# Altium PCB Zigbee_GW.PcbDoc (part 2 of 2)
Units mm, origin at the board's own origin, x right, y up, seen from the top; angles counter-clockwise.
Board outline 80.85 x 47.5 mm, 2 copper layers (Top Layer, Bottom Layer), stack 1.569 mm thick; 135 components, 110 nets, 481 pads, 279 vias.
Unrouted connection lines stored in the file: 2.
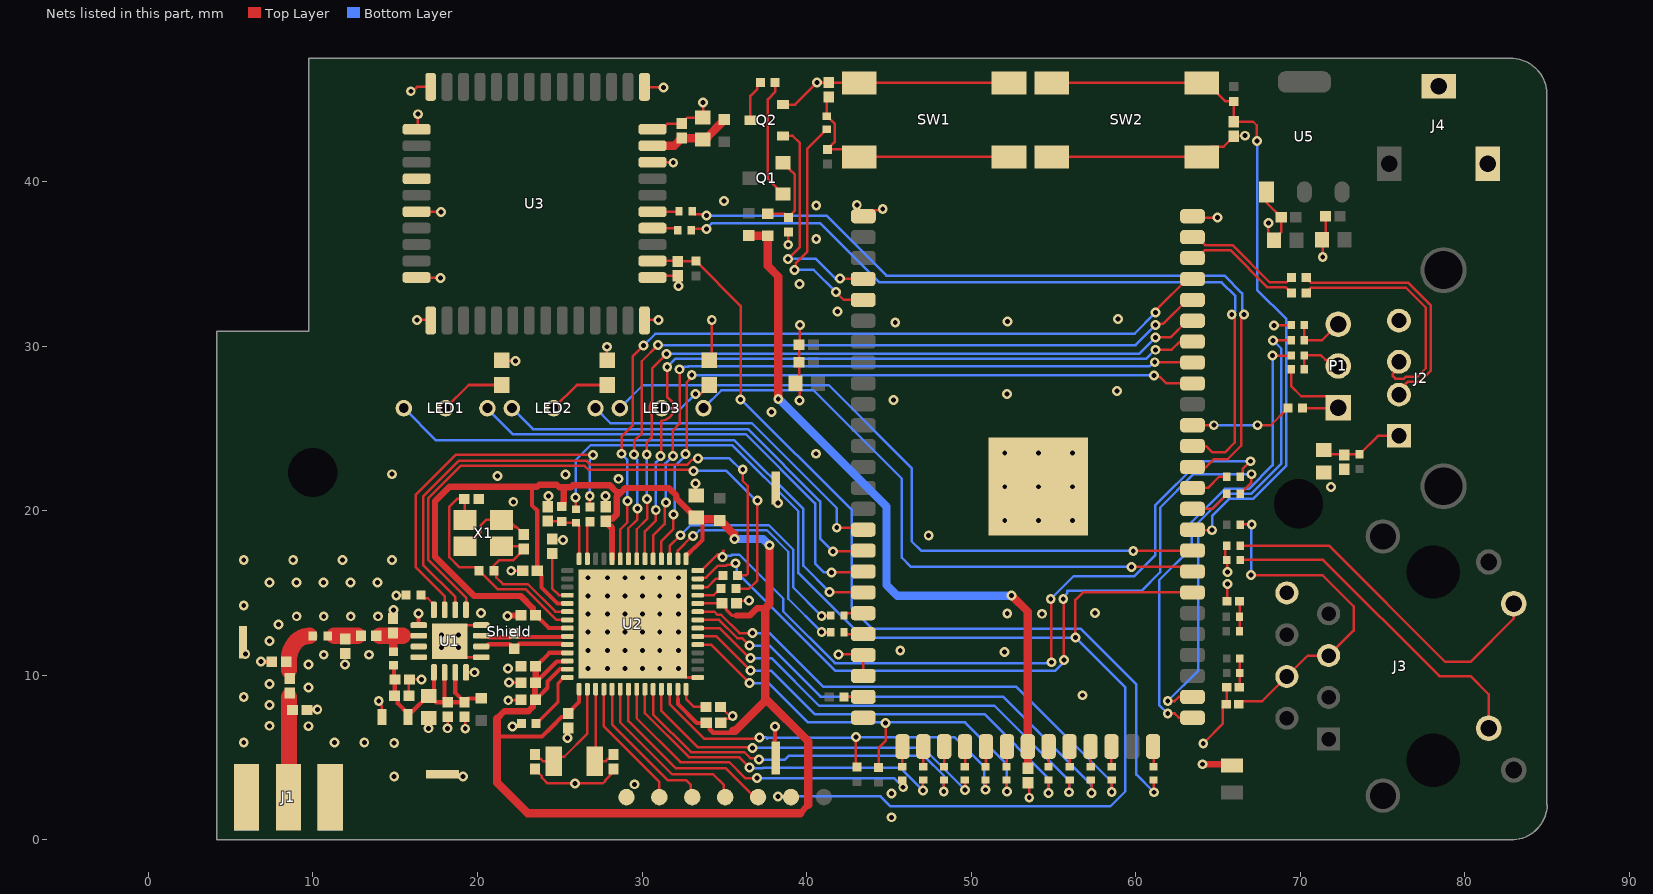
[diagram p2: the nets of this part, all layers, seen from the top]

## Via types
v1: diameter 0.6, hole 0.3, Top Layer to Bottom Layer, tented both sides, 279 vias

## Nets (pads, with @x,y where several pads share a name; then routed paths per layer and width w, separated by ;. In a path a pad name is that pad's centre, name@x,y a point inside that pad or via, vN(x,y) a via of type N, cw(c..) or ccw(c..) an arc to the next point about the centre after c; other vN are vias at no path point) (continued)
GND: ?.1 ?.22 ?.23 ?.25 ?.63 ?.64 C1.1 C2.1 C3.1 C4.1 C5.1 C6.1 C7.1 C8.1 C10.1 C11.1 C12.1 C13.1 C14.1 C15.1 C16.1 C17.1 C18.1 C19.1 C20.1 C21.1 C22.1 C23.1 C24.1 C25.1 C26.1 C27.1 C28.1 C29.1 C30.1 C31.1 C32.1 C33.1 C34.1 C35.1 C36.1 C46.1 C47.1 C48.1 C49.1 C50.1 C51.1 C52.1 C53.1 C54.1 C55.1 J1.2 J1.3 J1.4 J1.5 J2.4 J3.8 J4.2 J4.3 P1.1 Q2.2 R7.1 R9.1 R24.1 R28.1 R29.1 R34.1 R36.2 R38.1 R39.1 R40.1 R51.1 R52.1 Shield.1 Shield.2 Shield.3 Shield.4 SW1.3 SW1.4 SW2.3 SW2.4 TP7.1 U1.1 U1.4 U1.9 U1.11 U1.12 U1.16 U1.17 U2.1 U2.57 U3.1 U3.8 U3.10 U3.11 U3.24 U3.25 U3.28 U3.30 U3.34 U3.35 U3.48 U5.1 X1.2 X1.4 | length 122.5
  Top Layer w0.152: v1(13.995,8.433) 13.995,8.327 14.186,8.137 C6.1@14.186,7.468 ; v1(15.062,14.86) 15.629,14.86 R7.1@15.654,14.884 ; C7.1@15.832,8.763 15.832,9.728 C8.1@15.858,9.754 v1(16.603,9.754) ; v1(15.945,45.502) 16.066,45.502 16.334,45.771 U3.24@17.149,45.771 ; U3.34@16.3,34.184 16.318,34.166 17.73,34.166 v1(17.748,34.148) ; U3.30@16.3,38.184 16.311,38.173 17.762,38.173 v1(17.773,38.162) ; U3.25@16.3,43.184 16.376,43.26 v1(16.376,44.105) ; v1(16.326,31.608) 17.114,31.608 U3.35@17.15,31.572 ; v1@17.018,6.851 17.018,7.377 C31.1@17.043,7.402 ; v1(18.186,6.782) C32.1@18.186,7.485 ; U1.17@18.771,11.633 U1.17@19.301,11.103 ; U1.17@18.771,12.522 U1.17@19.301,13.053 ; C33.1@19.202,7.485 19.253,7.434 v1(19.253,6.756) ; X1.4@19.245,17.844 19.345,17.844 20.193,18.691 20.193,19.12 20.517,19.444 X1.2@21.445,19.444 21.891,19.444 22.276,19.059 22.276,19.016 22.363,19.016 22.809,18.57 C19.1@22.809,18.55 ; U1.16@19.302,10.178 19.309,10.185 v1(19.812,10.185) ; U1.1@20.226,11.103 U1.17@19.301,11.103 ; U1.4@20.226,13.053 U1.17@19.301,13.053 ; R38.1@21.463,29.147 21.502,29.108 v1(22.301,29.108) ; v1(21.869,8.484) 22.242,8.484 22.268,8.509 ; v1(21.92,9.576) 22.242,9.576 22.268,9.55 ; v1(22.047,16.358) C22.1@22.75,16.358 ; C17.1@23.495,4.31 23.495,4.29 23.904,3.881 23.904,3.781 24.256,3.429 27.613,3.429 27.772,3.587 27.772,3.635 28.27,4.134 C18.1@28.27,4.154 ; C14.1@24.257,20.252 24.308,20.303 v1(24.308,20.904) ; C16.1@24.536,18.296 24.604,18.228 v1(25.197,18.228) ; v1(25.476,6.198) 25.476,6.774 C24.1@25.502,6.799 ; C29.1@27.788,20.244 27.762,20.269 27.788,20.295 v1(27.788,20.904) ; v1(27.864,29.972) 27.864,29.173 R39.1@27.889,29.147 ; U2.57@29.426,13.119 32.676,9.869 U2.1@33.387,9.869 ; U3.11@30.149,45.771 30.189,45.731 v1(31.312,45.731) ; U3.48@30.185,31.608 v1(31.007,31.608) ; U3.1@30.635,34.184 30.733,34.282 C36.1@32.182,34.282 ; U3.8@30.635,41.184 30.648,41.172 31.883,41.172 v1(31.896,41.159) ; U3.10@30.635,43.184 31.207,43.184 31.552,43.529 32.396,43.529 C35.1@32.41,43.544 32.41,43.564 32.738,43.891 C34.1@33.706,43.891 ; C36.1@32.167,34.282 32.156,33.985 32.233,33.909 32.207,33.884 v1(32.207,33.655) ; C21.1@33.249,20.945 v1(33.249,21.666) ; C34.1@33.68,43.906 33.706,43.931 v1(33.706,44.82) ; R40.1@34.087,29.147 34.239,29.3 v1(34.239,31.598) ; C23.1@34.783,7.112 35.026,7.356 35.225,7.356 35.388,7.518 v1(35.509,7.518) 35.424,7.604 35.266,7.604 34.793,8.077 C15.1@34.773,8.077 C15.1@34.959,7.891 ; C23.1@34.806,7.112 34.908,7.112 C23.1@34.959,7.163 ; C30.1@35.746,14.376 35.917,14.548 v1(36.5,14.548) ; Q2.2@38.565,44.691 39.306,44.691 v1(40.64,46.025) 41.343,46.025 C1.1@41.351,46.033 41.37,46.014 SW1.4@43.202,46.014 SW1.3@52.302,46.014 ; v1(38.887,36.17) R36.2@38.887,36.939 ; v1(39.573,26.695) 39.573,27.367 39.395,27.544 39.472,27.621 C2.1@39.33,27.762 39.54,27.972 C3.1@39.54,29.032 C4.1@39.54,30.099 39.522,30.099 39.599,30.175 v1(39.599,31.293) ; v1(41.935,11.278) 43.4,11.278 ?.22@43.445,11.233 ?.23@43.445,9.963 ; ?.1@43.455,37.903 43.809,38.256 44.418,38.256 44.507,38.345 v1(44.628,38.345) ; C5.1@53.458,3.47 53.466,3.478 53.534,3.41 v1(53.534,2.563) ; SW2.3@54.911,41.514 SW2.4@64.011,41.514 64.635,42.138 65.356,42.138 65.964,42.745 C55.1@65.964,42.765 65.997,42.799 v1(66.65,42.799) ; ?.63@63.455,37.903 63.537,37.821 v1(64.973,37.821) ; v1(64.11,5.867) 65.305,7.063 65.305,8.071 65.489,8.255 C48.1@65.509,8.255 65.533,8.255 C50.1@65.533,9.271 ; R29.1@65.45,17.031 65.45,17.869 R28.1@65.462,17.882 ; C49.1@65.457,14.503 65.38,14.581 65.583,14.784 v1(65.583,15.545) ; R29.1@65.548,17.018 65.565,17.001 65.565,16.299 v1(65.583,16.281) ; U5.1@67.966,39.428 67.966,38.711 68.831,37.846 C54.1@68.851,37.846 68.851,36.937 68.413,36.499 C53.1@68.413,36.449 68.072,36.79 v1(68.072,37.49) ; v1(68.402,31.267) 69.425,31.267 R51.1@69.45,31.293 ; R52.1@69.45,28.6 69.45,27.578 70.066,26.962 71.615,26.962 72.288,26.289 72.288,26.238 R24.1@70.148,26.238 ; v1(71.374,35.433) 71.374,36.434 C51.1@71.334,36.474 71.544,36.684 C52.1@71.544,37.897 ; U1.17@19.301,11.103 U1.17@18.326,12.078 U1.17@19.301,13.053
  Top Layer w0.254: v1(6.833,10.846) ccw(c6.894,10.907) 6.894,10.82 C12.1@7.474,10.82 ; C13.1@9.635,7.899 cw(c9.696,7.838) 9.696,7.925 v1(10.262,7.925) ; C10.1@14.859,13.445 14.872,13.457 14.872,13.957 v1(14.884,13.97) ; v1(16.408,13.767) 16.408,13.07 U1.9@16.426,13.053 ; 38.049,6.071 ccw(c37.988,6.132) 38.075,6.132 v1(38.075,6.883)
  Top Layer w0.381: v1(21.832,13.614) 21.858,13.64 22.611,13.64 C28.1@22.637,13.665 ; v1(64.055,4.597) 65.798,4.597 R34.1@65.862,4.533
  other v1: 45.161,1.372 45.161,2.819 29.54,3.378 25.934,3.429 14.935,3.861 19.126,3.861 14.935,5.893 5.791,5.918 11.303,5.918 13.119,5.918 17.018,6.782 22.123,6.883 9.728,6.909 7.366,6.934 7.366,8.204 5.791,8.693 56.769,8.788 9.728,9.271 7.366,9.474 21.844,10.414 26.726,10.419 27.902,10.419 28.96,10.419 30.019,10.419 31.077,10.419 32.22,10.419 9.728,10.668 11.938,10.668 10.655,11.252 13.411,11.252 5.886,11.3 52.019,11.43 45.695,11.506 26.726,11.521 27.902,11.521 28.96,11.521 30.019,11.521 31.077,11.521 32.22,11.521 17.818,11.697 18.834,11.697 7.366,12.09 17.818,12.459 18.834,12.459 26.726,12.624 27.902,12.624 28.96,12.624 30.019,12.624 31.077,12.624 32.22,12.624 7.899,13.081 9.011,13.589 10.655,13.589 12.294,13.589 13.945,13.589 26.726,13.726 27.902,13.726 28.96,13.726 30.019,13.726 31.077,13.726 32.22,13.726 54.305,13.741 52.197,13.767 20.218,13.792 57.531,13.792 5.791,14.243 26.726,14.828 27.902,14.828 28.96,14.828 30.019,14.828 31.077,14.828 32.22,14.828 7.366,15.646 9.004,15.646 10.643,15.646 12.281,15.646 13.919,15.646 26.726,15.931 27.902,15.931 28.96,15.931 30.019,15.931 31.077,15.931 32.22,15.931 5.791,17.018 8.797,17.018 11.803,17.018 14.808,17.018 47.422,18.491 52.045,19.406 54.102,19.406 56.159,19.406 38.252,20.472 22.174,20.549 71.882,21.438 52.045,21.463 54.102,21.463 56.159,21.463 28.575,21.946 21.209,22.123 25.349,22.2 14.808,22.225 40.564,23.47 52.045,23.52 54.102,23.52 56.159,23.52 37.871,26.01 45.288,26.746 52.172,27.102 58.877,27.28 45.39,31.445 52.222,31.496 58.928,31.648 41.885,32.106 39.573,33.782 40.589,36.525 40.589,38.557 43.053,38.583 34.976,38.837
GPIO_15: ?.46 LED3.1 | length 37.5
  Top Layer w0.152: v1(59.741,16.586) 63.182,16.586 ?.46@63.455,16.313
  Bottom Layer w0.152: LED3.1@33.731,26.238 34.819,27.326 40.416,27.326 45.786,21.956 45.786,17.155 46.355,16.586 v1(59.741,16.586)
GPIO_16: ?.47 LED3.3 | length 42.2
  Top Layer w0.152: v1(59.855,17.564) 63.437,17.564 ?.47@63.455,17.583
  Bottom Layer w0.152: LED3.3@28.651,26.238 30.043,27.63 41.356,27.63 46.389,22.597 46.389,18.152 46.977,17.564 v1(59.855,17.564)
GPIO_17: ?.48 C55.2 R37.1 SW2.1 SW2.2 | length 43.7
  Top Layer w0.152: SW2.1@54.911,46.014 SW2.2@64.011,46.014 64.361,46.014 64.985,45.39 64.985,45.364 65.46,44.889 R37.1@65.964,44.889 C55.2@65.964,43.645 67.149,43.645 67.361,43.434 67.361,42.418 67.386,42.443 v1(67.386,42.469) ; ?.48@63.455,18.853 63.486,18.821 v1(64.643,18.821)
  Bottom Layer w0.152: v1(64.643,18.821) 64.643,19.696 65.673,20.726 67.142,20.726 69.159,22.744 69.159,31.659 67.386,33.433 v1(67.386,42.469)
GPIO_41: ?.16 LED2.1 | length 20
  Top Layer w0.152: v1(41.834,18.974) 43.324,18.974 ?.16@43.445,18.853
  Bottom Layer w0.152: LED2.1@27.165,26.238 28.08,25.324 36.677,25.324 41.834,20.167 v1(41.834,18.974)
GPIO_42: ?.17 LED2.3 | length 26.3
  Top Layer w0.152: v1(41.605,17.526) 41.634,17.554 43.245,17.554 ?.17@43.359,17.669
  Bottom Layer w0.152: LED2.3@22.085,26.238 23.36,24.963 36.428,24.963 40.818,20.573 40.818,18.313 v1(41.605,17.526)
GPIO_43: ?.18 LED1.1 | length 29.2
  Top Layer w0.152: v1(41.504,16.256) 43.389,16.256 ?.18@43.445,16.313
  Bottom Layer w0.152: LED1.1@20.599,26.238 20.599,26.187 22.128,24.659 36.301,24.659 40.513,20.447 40.513,16.795 41.052,16.256 v1(41.504,16.256)
JTAG_TCK: TP3.1 U2.47 | length 9.2
  Top Layer w0.152: U2.47@28.176,9.158 28.176,7.01 31.554,3.632 32.664,3.632 32.968,3.329 32.968,2.684 TP3.1@33.052,2.6
JTAG_TD0: TP5.1 U2.48 | length 10.7
  Top Layer w0.152: U2.48@28.676,9.158 28.676,7.138 31.826,3.988 34.315,3.988 34.975,3.329 34.975,2.677 TP5.1@35.052,2.6
JTAG_TDI: TP4.1 U2.49 | length 11.7
  Top Layer w0.152: U2.49@29.176,9.158 29.176,7.222 32.055,4.343 35.096,4.343 36.84,2.6 TP4.1@37.052,2.6
JTAG_TMS: TP2.1 U2.46 | length 8
  Top Layer w0.152: U2.46@27.675,9.158 27.675,6.894 31.052,3.517 TP2.1@31.052,2.6
Net_5: ?.5 R41.2 | length 14.3
  Top Layer w0.152: v1(39.268,34.646) 39.33,34.707 39.33,35.038 40.03,35.738 40.03,41.993 41.05,43.013 41.05,43.038 41.199,43.186 R41.2@41.224,43.186 ; v1(41.783,33.299) 42.26,32.823 ?.5@43.445,32.823
  Bottom Layer w0.152: v1(39.268,34.646) 40.437,34.646 v1(41.783,33.299)
Net_20: ?.20 R45.1 | length 1.2
  Top Layer w0.152: R45.1@42.277,13.64 42.361,13.64 42.494,13.773 ?.20@43.445,13.773
Net_21: ?.21 R44.1 | length 1.2
  Top Layer w0.152: R44.1@42.277,12.624 42.373,12.624 42.494,12.503 ?.21@43.445,12.503
Net_24: ?.24 R23.2 | length 1.2
  Top Layer w0.152: R23.2@42.277,8.687 42.282,8.693 ?.24@43.445,8.693
Net_26: ?.26 R22.2 | length 1.2
  Top Layer w0.152: R22.2@45.822,4.439 45.825,4.442 ?.26@45.825,5.673
Net_27: ?.27 R11.2 | length 1.2
  Top Layer w0.152: ?.27@47.095,5.673 47.095,4.471 R11.2@47.127,4.439
Net_28: ?.28 R46.2 | length 1.3
  Top Layer w0.152: ?.28@48.365,5.673 48.365,4.506 R46.2@48.433,4.439
Net_29: ?.29 R47.2 | length 1.3
  Top Layer w0.152: ?.29@49.635,5.673 49.635,4.542 R47.2@49.738,4.439
Net_30: ?.30 R48.2 | length 1.3
  Top Layer w0.152: ?.30@50.905,5.673 50.905,4.577 R48.2@51.044,4.439
Net_31: ?.31 R49.2 | length 1.2
  Top Layer w0.152: R49.2@52.146,4.439 52.175,4.468 ?.31@52.175,5.673
Net_33: ?.33 R14.1 | length 1.2
  Top Layer w0.152: R14.1@54.712,4.439 54.715,4.442 ?.33@54.715,5.673
Net_34: ?.34 R15.1 | length 1.2
  Top Layer w0.152: ?.34@55.985,5.673 55.985,4.443 R15.1@55.99,4.439
Net_35: ?.35 R16.1 | length 1.2
  Top Layer w0.152: ?.35@57.255,5.673 57.255,4.452 R16.1@57.269,4.439
Net_36: ?.36 R17.1 | length 1.2
  Top Layer w0.152: ?.36@58.525,5.673 58.525,4.46 R17.1@58.547,4.439
Net_38: ?.38 R13.1 | length 1.2
  Top Layer w0.152: ?.38@61.065,5.673 61.087,5.651 R13.1@61.087,4.439
Net_39: ?.39 R19.1 | length 28.4
  Top Layer w0.152: v1(61.951,7.681) 62.37,7.681 62.629,7.423 ?.39@63.455,7.423 ; v1(68.326,29.439) 69.435,29.439 R19.1@69.444,29.447
  Bottom Layer w0.152: v1(61.951,7.681) 61.422,8.21 61.422,15.779 63.421,17.778 63.421,19.337 65.421,21.336 66.889,21.336 68.326,22.773 v1(68.326,29.439)
Net_40: ?.40 R18.1 | length 28.6
  Top Layer w0.152: v1(61.951,8.434) 62.37,8.434 62.629,8.693 ?.40@63.455,8.693 ; v1(68.351,30.353) 69.427,30.353 R18.1@69.444,30.37
  Bottom Layer w0.152: v1(61.951,8.434) 63.792,10.275 63.792,19.276 65.547,21.031 67.015,21.031 68.855,22.87 68.855,29.85 v1(68.351,30.353)
Net_45: ?.45 R12.1 TP6.1 | length 83.6
  Top Layer w0.152: v1(25.959,20.803) 25.959,20.161 25.933,20.136 R12.1@25.984,20.085 ; v1(38.252,2.642) 38.273,2.621 39.031,2.621 TP6.1@39.052,2.6 ; v1(56.337,12.294) 56.337,14.58 56.8,15.043 ?.45@63.455,15.043
  Bottom Layer w0.152: v1(25.959,20.803) 25.959,23.074 26.883,23.998 35.474,23.998 39.497,19.975 39.497,16.22 43.423,12.294 v1(56.337,12.294) ; v1(38.252,2.642) 44.501,2.642 45.108,2.035 58.459,2.035 59.38,2.956 59.38,9.25 v1@56.312,12.319
Net_49: ?.49 R50.1 | length 2.5
  Top Layer w0.152: ?.49@63.455,20.123 64.664,20.123 65.548,21.006 R50.1@65.548,21.031
Net_50: ?.50 R6.1 | length 2.4
  Top Layer w0.152: ?.50@63.455,21.393 64.395,21.393 65.075,22.073 R6.1@65.548,22.073
Net_51: ?.51 R43.1 | length 48.4
  Top Layer w0.152: R43.1@33.045,38.202 33.045,38.177 33.194,38.028 33.829,38.028 v1(33.909,37.948) ; ?.51@63.455,22.663 64.281,22.663 64.764,23.145 65.599,23.145 66.421,23.967 66.421,31.755 v1(66.594,31.928)
  Bottom Layer w0.152: v1(33.909,37.948) 41.199,37.948 44.856,34.29 65.396,34.29 66.472,33.214 66.472,32.05 v1(66.594,31.928)
Net_52: ?.52 R42.1 | length 47.1
  Top Layer w0.152: R42.1@32.982,37.059 33.058,37.135 v1(33.909,37.135) ; ?.52@63.455,23.933 64.281,23.933 64.662,23.552 65.43,23.552 66.015,24.136 66.015,31.755 v1(65.842,31.928)
  Bottom Layer w0.152: v1(33.909,37.135) 34.257,37.482 40.826,37.482 44.425,33.884 65.227,33.884 66.065,33.045 66.065,32.152 v1(65.842,31.928)
Net_53: ?.53 R24.2 | length 6.2
  Top Layer w0.152: ?.53@63.455,25.203 v1(64.75,25.203) ; v1(67.417,25.203) 68.212,25.203 R24.2@69.248,26.238
  Bottom Layer w0.152: v1(64.75,25.203) v1(67.417,25.203)
NetC1_2: C1.2 R1.1 R41.1 SW1.1 SW1.2 | length 14.8
  Top Layer w0.152: C1.2@41.351,45.153 41.224,45.026 R41.1@41.224,43.986 41.249,43.986 41.707,43.529 41.707,42.404 R1.1@41.275,41.972 42.744,41.972 SW1.2@43.202,41.514 SW1.1@52.302,41.514
NetC9_1: C9.1 C12.2 L3.2 | length 2.8
  Top Layer w1: 8.543,10.312 8.543,10.82 8.543,10.981 cw(c10.076,10.981) 8.992,12.065 cw(c9.789,11.268) L3.2@9.789,12.395
NetC9_2: C9.2 C13.2 J1.1 | length 6.1
  Top Layer w1: J1.1@8.543,2.591 C9.2@8.543,8.687
NetC10_2: C10.2 L1.2 L4.1 U1.10 | length 2.6
  Top Layer w0.5: C10.2@14.859,12.565 14.872,12.552 14.872,12.395 14.872,11.451 L1.2@14.884,11.439
  Top Layer w1: L4.1@14.046,12.395 14.872,12.395 15.469,12.395
NetC11_2: C11.2 L3.1 L4.2 | length 1.4
  Top Layer w1: 11.303,12.395 L4.2@12.725,12.395
NetC14_2: C14.2 R4.1 R12.2 U2.28 | length 4.1
  Top Layer w0.152: C14.2@24.257,19.372 24.267,19.362 R4.1@25.121,19.362 25.198,19.285 26.009,19.285 26.175,19.119 U2.28@26.175,17.08
NetC15_2: C15.2 U2.56 | length 2
  Top Layer w0.152: U2.56@32.677,9.158 32.677,8.553 33.152,8.077 C15.2@33.893,8.077
NetC16_2: C16.2 U2.32 | length 3.2
  Top Layer w0.152: C16.2@24.536,17.416 24.536,15.291 24.949,14.878 25.456,14.878 U2.32@25.465,14.869
NetC17_2: C17.2 U2.44 Y1.1 | length 6.8
  Top Layer w0.152: C17.2@23.495,5.19 23.495,5.17 23.729,4.936 23.832,4.936 23.993,4.775 Y1.1@24.633,4.775 24.911,5.054 25.272,5.054 26.675,6.457 U2.44@26.675,9.158
NetC18_2: C18.2 U2.45 Y1.2 | length 5.7
  Top Layer w0.152: U2.45@27.175,9.158 27.175,4.818 Y1.2@27.133,4.775 27.772,4.775 27.933,4.936 28.036,4.936 28.27,5.17 C18.2@28.27,5.19
NetC19_2: C19.2 R8.1 U2.34 X1.3 | length 9.8
  Top Layer w0.152: R8.1@20.955,16.358 20.955,16.637 21.311,16.993 22.149,16.993 22.573,17.416 22.575,17.416 22.809,17.65 C19.2@22.809,17.67 22.809,17.844 X1.3@21.445,17.844 ; R8.1@20.999,16.358 21.141,16.215 21.141,15.943 21.539,15.545 23.052,15.545 24.727,13.869 U2.34@25.465,13.869
NetC20_2: C20.2 R8.2 U2.35 X1.1 | length 14.2
  Top Layer w0.152: X1.1@19.245,19.444 19.233,19.456 19.233,20.688 C20.2@19.194,20.726 18.763,20.726 18.288,20.251 18.288,17.178 18.909,16.556 19.9,16.556 21.216,15.24 22.925,15.24 24.796,13.369 U2.35@25.465,13.369
NetC34_2: C34.2 C35.2 FB4.1 U3.9 | length 5
  Top Layer w0.508: U3.9@30.635,42.184 31.951,42.184 C35.2@32.41,42.644 ; C35.2@32.41,42.664 C35.2@32.41,42.644 ; C34.2@33.976,42.644 C35.2@32.41,42.644 ; C34.2@33.976,42.727 34.905,43.656 34.905,43.708 34.976,43.779 FB4.1@35.001,43.779
NetC36_2: C36.2 R10.1 R13.2 U3.2 | length 54.7
  Top Layer w0.152: U3.2@30.635,35.184 32.159,35.184 C36.2@32.182,35.162 33.264,35.162 R10.1@33.274,35.172 35.992,32.454 v1(35.992,26.772) ; R13.2@61.087,3.639 61.112,3.613 v1(61.112,2.896)
  Bottom Layer w0.152: v1(35.992,26.772) 36.016,26.772 42.748,20.039 42.748,14.072 43.998,12.822 56.672,12.822 60.046,9.449 60.046,3.962 v1(61.112,2.896)
NetC46_2: C46.2 C47.2 FB5.2 J2.1 | length 5.2
  Top Layer w0.152: C46.2@71.425,23.687 71.675,23.437 72.634,23.437 C47.2@72.669,23.402 72.705,23.437 FB5.2@73.609,23.437 74.731,24.558 J2.1@76.005,24.558
NetC48_2: C48.2 J3.2 J3.5 R27.1 | length 21.1
  Top Layer w0.152: C48.2@66.269,8.255 66.452,8.439 67.697,8.439 70.46,11.201 J3.5@71.73,11.201 73.254,12.725 73.254,14.199 71.374,16.078 v1@67.005,16.078 ; R27.1@66.348,19.152 66.373,19.177 v1(67.056,19.177)
  Bottom Layer w0.152: v1(67.005,16.104) 67.031,16.129 67.031,19.152 v1(67.056,19.177)
NetC49_2: C49.2 R30.1 R31.1 | length 1.8
  Top Layer w0.152: R30.1@66.313,12.675 R31.1@66.313,13.564 66.313,14.498 C49.2@66.318,14.503
NetC50_2: C50.2 R32.1 R33.1 | length 1.8
  Top Layer w0.152: C50.2@66.293,9.271 66.338,9.316 R33.1@66.338,11.024
NetFB6_1: FB6.1 Q1.2 R36.1 | length 5.2
  Top Layer w0.152: FB6.1@37.643,38.064 38.662,38.064 R36.1@38.887,37.839 39.294,38.245 39.294,40.431 38.94,40.784 38.94,40.834 38.617,41.158 Q1.2@38.567,41.158
NetJ3_10: J3.10 R29.2 | length 20.7
  Top Layer w0.152: R29.2@66.237,17.018 71.399,17.018 78.461,9.957 80.34,9.957 81.46,8.837 J3.10@81.46,6.781
NetJ3_11: J3.11 R28.2 | length 21.6
  Top Layer w0.152: R28.2@66.262,17.882 71.757,17.882 78.818,10.82 80.34,10.82 82.98,13.46 J3.11@82.98,14.351
NetLED1_2: LED1.2 R38.2 | length 4
  Top Layer w0.152: LED1.2@18.059,26.238 19.468,27.647 R38.2@21.463,27.647
NetLED2_2: LED2.2 R39.2 | length 3.8
  Top Layer w0.152: LED2.2@24.625,26.238 26.034,27.647 R39.2@27.889,27.647
NetLED3_2: LED3.2 R40.2 | length 3.6
  Top Layer w0.152: v1(33.245,27.099) 33.365,27.099 33.452,27.012 R40.2@34.087,27.647
  Bottom Layer w0.152: LED3.2@31.191,26.238 32.384,26.238 v1(33.245,27.099)
NetP1_2: P1.2 R19.2 R52.2 | length 3.2
  Top Layer w0.152: R52.2@70.25,28.6 R19.2@70.25,29.447 71.264,29.447 71.526,29.185 71.555,29.185 71.936,28.804 P1.2@72.314,28.804
NetP1_3: P1.3 R18.2 R51.2 | length 3.4
  Top Layer w0.152: R51.2@70.25,31.293 R18.2@70.25,30.37 71.34,30.37 P1.3@72.314,31.344
NetQ1_1: Q1.1 R35.1 | length 7.4
  Top Layer w0.152: R35.1@38.093,46.025 38.093,45.459 37.643,45.009 37.643,40.182 38.193,39.632 38.193,39.582 38.517,39.258 Q1.1@38.567,39.258
NetQ2_3: Q2.3 R35.2 | length 2.5
  Top Layer w0.152: Q2.3@36.583,43.739 36.583,45.219 37.007,45.643 37.007,45.839 R35.2@37.193,46.025
NetR2_2: R2.2 U1.5 | length 35.8
  Top Layer w0.152: U1.5@19.302,13.983 19.302,14.726 16.996,17.032 16.996,20.755 18.974,22.733 26.507,22.733 26.731,22.509 33.041,22.509 v1(33.122,22.428) ; R2.2@35.705,15.265 36.5,15.265 37.008,15.773 v1(37.008,20.625)
  Bottom Layer w0.152: v1(33.122,22.428) 35.123,22.428 36.927,20.625 v1(37.008,20.625)
NetR3_2: R3.2 U1.6 | length 35.7
  Top Layer w0.152: U1.6@18.651,13.978 18.651,14.75 16.691,16.71 16.691,20.881 18.848,23.038 26.634,23.038 26.857,22.814 32.756,22.814 33.047,23.105 33.315,23.105 v1(33.401,23.19) ; R3.2@35.807,16.078 36.334,16.078 36.424,16.167 36.424,21.514 36.119,21.819 v1(36.119,22.504)
  Bottom Layer w0.152: v1(33.401,23.19) 35.312,23.19 35.998,22.504 v1(36.119,22.504)
NetR5_2: R5.2 U1.7 | length 22.8
  Top Layer w0.152: U1.7@18.001,13.978 18.001,14.816 16.256,16.561 16.256,20.98 18.669,23.393 v1(27.026,23.393) ; U1.7@18.039,14.015 U1.7@18.076,13.978 ; v1(26.822,20.904) 26.822,20.313 26.797,20.287 R5.2@26.848,20.237
  Bottom Layer w0.152: v1(26.822,20.904) 26.822,23.08 27.026,23.284 v1(27.026,23.393)
NetR7_2: R7.2 U1.8 | length 1.4
  Top Layer w0.152: R7.2@16.554,14.884 16.752,14.686 16.973,14.686 17.351,14.308 U1.8@17.351,13.983
NetR9_2: R9.2 U2.42 | length 3.7
  Top Layer w0.203: R9.2@23.564,7.061 24.284,7.782 24.892,8.389 24.892,9.523 25.19,9.821 25.417,9.821 U2.42@25.465,9.869
NetR42_2: R42.2 U3.4 | length 1.6
  Top Layer w0.152: U3.4@30.635,37.184 32.056,37.184 R42.2@32.182,37.059
NetR43_2: R43.2 U3.5 | length 1.6
  Top Layer w0.152: U3.5@30.635,38.184 32.228,38.184 R43.2@32.245,38.202
NetR44_2: R44.2 U2.16 | length 14.6
  Top Layer w0.152: U2.16@32.177,17.08 32.183,17.086 32.183,17.596 33.053,18.466 v1(33.088,18.466) ; v1@40.928,12.689 41.019,12.598 41.451,12.598 R44.2@41.477,12.624
  Bottom Layer w0.152: v1(33.088,18.466) 33.134,18.466 33.485,18.817 37.582,18.817 38.887,17.512 38.887,14.656 v1(40.919,12.624)
NetR45_2: R45.2 U2.17 | length 14.8
  Top Layer w0.152: U2.17@31.676,17.08 31.676,17.859 v1(32.334,18.517) ; v1(40.919,13.614) 41.35,13.614 41.4,13.564 R45.2@41.477,13.64
  Bottom Layer w0.152: v1(32.334,18.517) 32.939,19.121 37.709,19.121 39.192,17.638 39.192,15.342 v1(40.919,13.614)
PA2: ?.55 U2.18 | length 42.6
  Top Layer w0.152: U2.18@31.176,17.08 31.176,18.16 31.902,18.886 v1(31.902,19.787) ; v1(32.639,23.444) 32.716,23.522 32.716,27.814 32.862,27.96 32.862,27.966 33.02,28.124 v1(33.02,28.245) ; v1(61.112,28.219) 61.194,28.138 61.473,28.138 61.869,27.743 ?.55@63.455,27.743
  Bottom Layer w0.152: v1(31.902,19.787) 31.974,19.858 31.974,22.692 32.639,23.357 v1(32.639,23.444) ; v1(33.02,28.245) 33.033,28.232 61.023,28.232 61.062,28.27 v1(61.112,28.219)
PA3: ?.56 U2.19 | length 43.6
  Top Layer w0.152: U2.19@30.676,17.08 30.676,18.492 31.374,19.189 31.374,20.426 v1(31.445,20.498) ; v1(31.877,23.343) 31.877,24.892 32.283,25.298 v1(32.283,28.6) ; v1(61.163,29.032) 63.436,29.032 ?.56@63.455,29.013
  Bottom Layer w0.152: v1(31.445,20.498) 31.445,22.86 31.42,22.885 v1(31.877,23.343) ; v1(32.283,28.6) 32.405,28.6 32.557,28.753 32.78,28.753 32.801,28.773 60.845,28.773 61.104,29.032 v1(61.163,29.032)
PA4: ?.57 U2.20 | length 45.2
  Top Layer w0.152: U2.20@30.176,17.08 30.176,18.746 30.836,19.406 v1(30.836,20.041) ; v1(31.115,23.343) 31.165,23.393 31.165,25.429 31.209,25.474 cw(c31.317,25.366) 31.21,25.475 31.427,25.549 ccw(c31.191,26.238) 31.623,26.825 ccw(c31.415,26.601) 31.619,26.829 ccw(c31.415,26.601) 31.576,26.861 31.531,26.906 31.531,26.973 31.531,27.29 v1(31.531,28.751) ; v1(61.214,29.787) 62.192,29.787 62.687,30.283 ?.57@63.455,30.283
  Bottom Layer w0.152: v1(30.836,20.041) 30.836,22.942 31.115,23.221 v1(31.115,23.343) ; v1(31.531,28.751) 32.015,29.235 60.619,29.235 61.171,29.787 v1(61.214,29.787)
PA5: ?.58 U2.21 | length 46.1
  Top Layer w0.152: U2.21@29.676,17.08 29.676,18.881 30.302,19.507 v1(30.302,20.726) ; v1(30.286,23.426) 30.286,24.155 30.582,24.451 30.582,25.839 cw(c31.191,26.238) 30.463,26.238 30.463,26.24 cw(c31.191,26.238) 30.607,26.674 30.607,28.651 v1(31.496,29.54) ; v1(61.214,30.54) 62.122,30.54 63.135,31.553 ?.58@63.455,31.553
  Bottom Layer w0.152: v1(30.286,23.426) 30.294,23.418 30.294,20.734 v1(30.302,20.726) ; v1(31.496,29.54) 60.215,29.54 v1(61.214,30.54)
PA6: ?.59 U2.22 | length 47.5
  Top Layer w0.152: U2.22@29.176,17.08 29.176,18.94 29.718,19.482 v1(29.718,20.142) ; v1(29.515,23.419) 29.515,24.232 29.981,24.698 29.981,29.09 v1(30.968,30.076) ; v1(61.214,31.292) 61.3,31.378 61.69,31.378 63.135,32.823 ?.59@63.455,32.823
  Bottom Layer w0.152: v1(29.515,23.419) 29.515,23.298 29.718,23.094 v1(29.718,20.142) ; v1(30.968,30.076) 59.998,30.076 v1(61.214,31.292)
PA7: ?.60 U2.23 | length 49
  Top Layer w0.152: U2.23@28.676,17.08 28.676,18.871 29.108,19.303 v1(29.108,20.599) ; v1(28.753,23.47) 28.753,24.511 29.426,25.184 29.426,29.375 v1(30.099,30.048) ; v1(61.214,32.044) 61.3,32.13 61.3,32.257 63.135,34.093 ?.60@63.455,34.093
  Bottom Layer w0.152: v1(28.753,23.47) 28.753,23.433 29.108,23.078 v1(29.108,20.599) ; v1(30.099,30.048) 30.815,30.764 59.934,30.764 v1(61.214,32.044)
PB0: R21.1 R49.1 U2.5 | length 27
  Top Layer w0.152: U2.5@33.387,11.869 34.181,11.869 v1(36.525,9.525) ; R21.1@44.374,4.412 44.374,5.588 44.806,6.02 v1(44.806,7.112) ; R49.1@52.146,3.639 52.172,3.613 v1(52.172,2.946)
  Bottom Layer w0.152: v1(36.525,9.525) 37.694,9.525 40.081,7.137 44.806,7.137 49.632,7.137 52.175,4.594 52.175,2.95 v1(52.172,2.946)
PB1: R20.1 R48.1 U2.54 | length 25.7
  Top Layer w0.152: U2.54@31.676,9.158 31.676,8.257 33.777,6.157 37.062,6.157 v1(37.13,6.225) ; v1(43.002,6.248) 43.002,4.489 R20.1@43.053,4.438 R20.1@43.078,4.463 ; v1(50.876,3.048) 50.876,3.634 R48.1@50.881,3.639
  Bottom Layer w0.152: v1(37.13,6.225) 37.534,6.225 37.602,6.157 37.648,6.203 42.956,6.203 43.002,6.157 43.094,6.248 48.997,6.248 50.791,4.454 50.791,3.134 v1(50.876,3.048)
PB2: R47.1 U2.53 | length 22.4
  Top Layer w0.152: U2.53@31.176,9.158 31.176,7.838 33.376,5.639 36.652,5.639 v1(36.703,5.588) ; R47.1@49.616,3.639 49.632,3.623 v1(49.632,3.023)
  Bottom Layer w0.152: v1(36.703,5.588) 47.091,5.588 49.632,3.047 v1(49.632,3.023)
PB3: R46.1 U2.52 | length 22.6
  Top Layer w0.152: U2.52@30.676,9.158 30.676,7.627 32.969,5.334 36.209,5.334 36.581,4.962 37.024,4.962 v1(37.109,4.877) ; v1(48.336,2.946) 48.336,3.623 R46.1@48.351,3.639
  Bottom Layer w0.152: v1(37.109,4.877) 38.679,4.877 38.908,5.105 47.142,5.105 48.336,3.912 v1(48.336,2.946)
PB4: R11.1 U2.51 | length 21
  Top Layer w0.152: U2.51@30.176,9.158 30.176,7.696 32.843,5.029 35.89,5.029 v1(36.525,4.394) ; v1(47.066,2.997) 47.066,3.618 R11.1@47.087,3.639
  Bottom Layer w0.152: v1(36.525,4.394) 36.571,4.348 37.332,4.348 37.373,4.389 45.674,4.389 v1(47.066,2.997)
PB5: R22.1 U2.50 | length 20.2
  Top Layer w0.152: U2.50@29.676,9.158 29.676,7.383 32.334,4.724 35.299,4.724 36.264,3.759 v1(36.982,3.759) ; R22.1@45.822,3.639 45.872,3.588 v1(45.872,3.2)
  Bottom Layer w0.152: v1(36.982,3.759) 45.314,3.759 v1(45.872,3.2)
PC0: R6.2 U2.14 | length 48
  Top Layer w0.152: U2.14@33.387,16.369 33.614,16.369 34.618,17.374 v1@34.9,17.374 ; v1(34.9,17.196) 34.9,17.526 34.95,17.577 ; v1(54.839,14.63) 54.864,14.605 54.864,10.82 v1(54.889,10.795) ; R6.2@66.348,22.073 66.497,22.221 66.497,22.529 v1(66.98,23.012)
  Bottom Layer w0.152: v1(34.9,17.196) 34.985,17.281 35.406,17.281 35.468,17.343 35.906,17.343 38.583,14.667 38.583,13.883 41.716,10.749 54.843,10.749 v1(54.889,10.795) ; v1(54.839,14.63) 56.236,16.028 59.93,16.028 61.189,17.286 61.189,20.319 63.882,23.012 v1(66.98,23.012)
PC1: R50.2 U2.13 | length 48.2
  Top Layer w0.152: U2.13@33.387,15.869 33.46,15.943 33.898,15.943 34.623,16.667 35.119,16.667 35.181,16.729 35.601,16.729 v1(35.687,16.815) ; v1(55.601,14.63) 55.626,14.605 55.626,10.947 v1(55.651,10.922) ; R50.2@66.348,21.031 67.031,21.714 v1(67.031,22.225)
  Bottom Layer w0.152: v1(35.687,16.815) 35.748,16.754 35.748,16.286 41.768,10.266 55.108,10.266 55.651,10.809 v1(55.651,10.922) ; v1(55.601,14.63) 55.601,14.752 55.855,15.006 55.855,15.138 60.35,15.138 61.493,16.281 61.493,20.193 63.525,22.225 v1(67.031,22.225)
PC2: R3.1 U2.12 | length 1.8
  Top Layer w0.152: U2.12@33.387,15.369 33.992,15.369 34.503,15.879 34.708,15.879 R3.1@34.907,16.078
PC3: R2.1 U2.11 | length 1.6
  Top Layer w0.152: U2.11@33.387,14.869 34.351,14.869 34.548,15.067 34.606,15.067 R2.1@34.805,15.265
PC4: R17.2 U2.9 | length 30.8
  Top Layer w0.152: U2.9@33.387,13.869 34.39,13.869 34.585,13.674 34.814,13.674 35.915,12.573 v1(36.703,12.573) ; v1(58.547,2.921) R17.2@58.547,3.639
  Bottom Layer w0.152: v1(36.703,12.573) 37.744,12.573 41.021,9.296 52.756,9.296 58.547,3.505 v1(58.547,2.921)
PC5: R16.2 U2.8 | length 29.4
  Top Layer w0.152: U2.8@33.387,13.369 34.688,13.369 35.789,12.268 36.068,12.268 v1(36.525,11.811) ; R16.2@57.269,3.639 57.328,3.579 v1(57.328,2.845)
  Bottom Layer w0.152: v1(36.525,11.811) 37.744,11.811 40.843,8.712 51.943,8.712 57.328,3.327 v1(57.328,2.845)
PC6: R15.2 U2.7 | length 27.9
  Top Layer w0.152: U2.7@33.387,12.869 34.72,12.869 36.54,11.049 v1(36.601,11.049) ; v1(55.956,2.896) 55.956,3.605 R15.2@55.99,3.639
  Bottom Layer w0.152: v1(36.601,11.049) 37.871,11.049 40.767,8.153 51.41,8.153 55.956,3.607 v1(55.956,2.896)
PC7: R14.2 U2.6 | length 26.6
  Top Layer w0.152: U2.6@33.387,12.369 34.519,12.369 v1(36.601,10.287) ; v1(54.712,2.845) R14.2@54.712,3.639
  Bottom Layer w0.152: v1(36.601,10.287) 37.847,10.287 40.493,7.641 50.804,7.641 54.712,3.733 v1(54.712,2.845)
PD2: R5.1 U2.27 | length 2.3
  Top Layer w0.152: U2.27@26.675,17.08 26.675,19.164 R5.1@26.848,19.337
RF_N: L2.1 U1.2 U2.38 | length 5.5
  Top Layer w0.254: U1.2@20.226,11.753 20.551,11.753 20.686,11.887 21.958,11.887 22.22,11.625 L2.1@22.225,11.625 22.23,11.625 22.521,11.916 25.115,11.916 25.139,11.892 25.442,11.892 U2.38@25.465,11.869
RF_P: L2.2 U1.3 U2.37 | length 5.5
  Top Layer w0.254: U1.3@20.226,12.403 20.256,12.373 20.662,12.373 20.71,12.325 20.766,12.294 21.958,12.294 22.22,12.555 22.23,12.555 22.463,12.322 25.145,12.322 25.169,12.346 25.442,12.346 U2.37@25.465,12.369
SW_RST: ?.4 Q2.1 | length 13.7
  Top Layer w0.152: Q2.1@38.565,42.786 39.161,42.786 39.599,42.349 39.599,36.043 v1(38.862,35.306) ; v1(42.037,34.112) 43.312,34.112 43.389,34.036 ?.4@43.445,34.093
  Bottom Layer w0.152: v1(38.862,35.306) 40.564,35.306 41.758,34.112 v1(42.037,34.112)
USBL_N: ?.62 R25.2 | length 7.3
  Top Layer w0.152: ?.62@63.455,36.633 63.736,36.633 64.218,36.15 65.885,36.15 68.151,33.884 69.163,33.884 R25.2@69.468,34.188
USBL_P: ?.61 R26.2 | length 7.3
  Top Layer w0.152: ?.61@63.455,35.363 63.736,35.363 64.218,35.845 65.758,35.845 68.025,33.579 69.138,33.579 R26.2@69.468,33.249
USBR_N: J2.2 R25.1 | length 14.9
  Top Layer w0.152: R25.1@70.368,34.188 70.567,33.99 70.567,33.96 70.656,33.871 76.542,33.871 77.787,32.626 77.94,32.474 77.94,28.537 77.241,27.838 76.53,27.838 76.005,27.313 J2.2@76.005,27.058
USBR_P: J2.3 R26.1 | length 14.9
  Top Layer w0.152: R26.1@70.368,33.249 70.567,33.447 70.567,33.477 70.656,33.566 76.416,33.566 77.635,32.347 77.635,28.664 77.114,28.143 76.404,28.143 76.302,28.042 75.794,28.042 75.641,28.194 75.641,28.344 76.005,28.707 J2.3@76.005,29.058
VDD_CC2538: C21.2 C22.2 C23.2 C24.2 C25.2 C26.2 C27.2 C28.2 C29.2 C30.2 FB2.2 R4.2 U2.10 U2.15 U2.24 U2.33 U2.36 U2.39 U2.40 U2.41 U2.43 U2.55 | length 125.9
  Top Layer w0.152: 32.177,8.553 U2.55@32.177,9.158 ; U2.10@33.387,14.369 34.859,14.369 C30.2@34.866,14.376
  Top Layer w0.203: C30.2@34.866,14.376 34.886,14.376 35.104,14.158 35.104,13.999 35.463,13.64 35.738,13.64
  Top Layer w0.254: 21.184,6.274 23.921,6.274 24.511,6.864 25.113,7.466 25.309,7.466 25.502,7.659 C24.2@25.502,7.679 25.502,7.699 26.175,8.372 U2.43@26.175,9.158 ; 23.317,21.463 23.317,20.324 23.63,20.011 C22.2@23.63,16.358 23.65,16.358 23.894,16.114 23.894,15.335 24.859,14.369 U2.33@25.465,14.369 ; C27.2@23.517,8.509 23.537,8.509 23.73,8.702 23.73,8.722 24.257,9.249 24.257,9.623 25.021,10.387 25.447,10.387 U2.41@25.465,10.369 ; C26.2@23.537,9.55 23.73,9.743 23.73,9.763 24.813,10.846 25.442,10.846 U2.40@25.465,10.869 ; C25.2@23.537,10.541 24.365,11.369 U2.39@25.465,11.369 ; C28.2@23.537,13.665 24.333,12.869 U2.36@25.465,12.869 ; 32.177,8.553 32.177,8.26 33.325,7.112 C23.2@33.903,7.112 33.923,7.112 34.116,6.919 34.116,6.724 34.327,6.513 35.418,6.513 35.545,6.64 ; U2.15@32.677,17.08 32.677,17.307 32.7,17.33 32.748,17.33 33.196,17.778 33.22,17.778 33.668,18.226 C21.2@33.668,19.276
  Top Layer w0.381: 21.184,7.366 21.636,7.819 23.092,7.819 23.367,8.095 23.367,8.379 C27.2@23.497,8.509 ; C27.2@23.517,8.509 C27.2@23.497,8.509 ; C26.2@23.517,9.55 23.497,9.55 C27.2@23.497,8.509 ; C25.2@23.517,10.541 23.537,10.541 C26.2@23.537,9.55 ; C28.2@23.517,13.665 23.497,13.665 23.367,13.795 23.367,14.08 22.626,14.821 19.799,14.821 17.415,17.205 17.415,20.581 18.297,21.463 23.317,21.463 23.622,21.463 23.749,21.59 24.816,21.59 24.968,21.438 25.375,21.438 ; R4.2@25.121,20.262 25.205,20.347 25.205,20.527 25.248,20.57 25.248,21.311 25.375,21.438 ; C29.2@27.788,19.364 27.788,19.344 28.176,18.956 U2.24@28.176,17.08 ; C29.2@27.788,19.384 27.917,19.513 28.202,19.513 28.466,19.777 28.466,20.866 28.6,21.001 28.726,21.126 ; C21.2@33.312,19.582 33.262,19.582 32.1,20.743 32.1,20.904 31.618,21.387 28.987,21.387 28.726,21.126 ; 35.738,13.64 36.556,13.64 36.988,14.072 37.49,14.072 ; 39.609,1.626 40.107,2.123 ; 25.375,21.438 25.685,21.438 25.794,21.547 28.054,21.547 28.475,21.126 28.726,21.126
  Top Layer w0.508: 21.184,7.366 21.184,6.274 21.184,3.48 23.038,1.626 39.609,1.626 ; C21.2@33.299,19.594 33.312,19.582 33.406,19.487 33.668,19.487 34.651,19.487 FB2.2@34.722,19.416 ; FB2.2@34.818,19.345 35.593,18.57 35.593,18.306 v1(35.611,18.288) ; 35.545,6.64 35.672,6.64 37.49,8.458 37.49,14.072 37.744,14.326 v1(37.744,17.907) ; 37.529,8.547 40.107,5.969 40.107,2.123
  Bottom Layer w0.508: v1(35.611,18.288) 37.363,18.288 v1(37.744,17.907)
VDD_CC2592: C6.2 C7.2 C8.2 C31.2 C32.2 C33.2 FB3.2 L1.1 U1.13 U1.14 U1.15 | length 14.2
  Top Layer w0.254: L1.1@14.884,10.609 14.931,10.562 14.931,9.8 C8.2@14.978,9.754 14.965,9.741 C7.2@14.965,8.77 ; C7.2@14.952,8.763 14.958,8.763 C7.2@14.965,8.77 ; C6.2@15.786,7.468 C6.2@15.786,7.668 ; C31.2@17.043,8.752 17.093,8.752 17.481,8.365 C32.2@18.186,8.365 ; U1.13@17.351,10.178 17.351,9.05 17.053,8.752 16.993,8.752 16.057,7.816 15.934,7.816 C6.2@15.786,7.668 ; U1.14@18.001,10.178 18.001,8.57 18.186,8.385 C32.2@18.186,8.365 ; U1.15@18.651,10.178 18.651,8.936 C33.2@19.202,8.385 ; FB3.2@20.218,8.6 19.417,8.6 C33.2@19.202,8.385 ; C7.2@14.965,8.77 15.155,8.58 15.155,8.298 C6.2@15.786,7.668 ; C32.2@18.186,8.365 C33.2@19.202,8.365 C33.2@19.202,8.385
VDD_FLASH: ?.32 C5.2 FB1.2 FB6.2 | length 44.2
  Top Layer w0.5: FB1.2@36.5,36.728 36.507,36.721 37.636,36.721 FB6.2@37.643,36.714 37.643,34.874 38.278,34.239 v1(38.278,26.797) ; v1(52.451,14.859) 53.443,13.867 53.443,5.674 ?.32@53.445,5.673 53.451,5.666 53.451,4.356 C5.2@53.458,4.35
  Bottom Layer w0.5: v1(38.278,26.797) 38.305,26.797 38.355,26.747 38.379,26.747 44.856,20.269 44.856,15.494 45.517,14.834 52.355,14.834 52.361,14.84 52.432,14.84 v1(52.451,14.859)
WLED: ?.19 LED1.3 | length 34.6
  Top Layer w0.152: v1(41.402,15.062) 43.273,15.062 43.349,15.138 ?.19@43.445,15.043
  Bottom Layer w0.152: LED1.3@15.519,26.238 17.455,24.303 35.6,24.303 39.802,20.102 39.802,16.662 v1(41.402,15.062)
pads on no net: ?.2 ?.3 ?.6 ?.7 ?.10 ?.11 ?.12 ?.13 ?.14 ?.15 ?.37 ?.54 J3.7 J3.9 J3.12 J3.MH1 J3.MH2 R23.1 U2.2 U2.3 U2.4 U2.25 U2.26 U2.29 U2.30 U2.31 U3.3 U3.6 U3.7 U3.12 U3.13 U3.14 U3.15 U3.16 U3.17 U3.18 U3.19 U3.20 U3.21 U3.22 U3.23 U3.26 U3.27 U3.29 U3.31 U3.32 U3.33 U3.36 U3.37 U3.38 U3.39 U3.40 U3.41 U3.42 U3.43 U3.44 U3.45 U3.46 U3.47
copper on no net: | length 0.1
  Top Layer w0.001: 15.418,0.356 15.469,0.305
  other v1: 44.653,13.843

## Polygon pours and split planes (outlines as drawn)
GND on Bottom Layer "GND_L02_P007" (solid, remove dead copper, pour order 7): 9.271,47.371 9.271,30.836 3.708,30.836 3.708,-0.152 84.633,-0.152 84.633,47.32
EARTH on Bottom Layer "EARTH_L02_P000" (solid, pour order 0): 85.014,36.449 84.836,36.271 74.93,36.271 74.93,33.147 78.816,33.147 78.816,22.682 73.939,22.682 73.939,17.348 81.966,17.348 81.966,3.658 63.729,3.658 63.729,-0.127 85.014,-0.127
GND on Top Layer "GND_L01_P006" (solid, remove dead copper, pour order 6): 9.5,47.815 9.5,31.28 3.937,31.28 3.937,0.292 84.861,0.292 84.861,47.765

## Keep-outs
Keep-Out Layer:
  lines w0.508: 84.988,45.364 ccw(c82.817,45.326) 82.779,47.498 9.754,47.498 9.754,30.912 4.166,30.912 4.166,0 82.804,0 ccw(c82.842,2.172) 85.014,2.134 ; 85,2.134 85,45.364

## Other copper
Top Layer:
  region net GND: 14.418,3.359 19.609,3.359 19.609,4.359 15.418,4.359 15.418,6.401 9.611,6.401 9.611,5.401 14.418,5.401
  region net +3V3: 71.478,46.609 68.809,46.609 68.555,46.355 68.555,41.427 70.536,39.446 70.739,39.446 70.739,40.945 71.755,41.961 71.755,46.332
  pour cut-out: 22.581,5.664 22.581,3.175 23.114,2.642 27.686,2.642 28.854,3.81 28.854,5.512 28.499,5.867 22.708,5.867 22.581,5.74 22.403,5.74 22.403,5.766 22.631,5.994 28.6,5.994 29.007,5.588 29.007,3.785 27.762,2.54 23.038,2.54 22.403,3.175 22.403,5.69
  region net VDD_CC2592: 15.164,10.846 14.605,10.846 14.58,10.82 14.58,8.484 15.342,7.722 15.342,7.137 15.519,6.96 16.078,6.96 16.18,7.061 16.18,7.772 16.691,8.284 20.447,8.28 20.574,8.407 20.574,8.839 20.472,8.941 16.891,8.941 16.205,8.255 15.339,8.255 15.155,8.439
  region net GND: 15.402,16.485 15.402,21.803 16.586,21.803 16.586,22.803 14.402,22.803 14.402,17.493 5.274,17.493 5.274,16.493 5.274,5.41 5.283,5.401 7.468,5.401 7.468,6.401 6.274,6.401 6.274,16.485
  region net GND: 37.583,3.359 37.583,6.394 38.583,6.394 38.583,3.359
  region: 34.798,20.995
  region net GND: 37.583,19.768 37.583,22.803 38.583,22.803 38.583,19.768
  region: -4.318,7.069
Multi-Layer:
  pour cut-out: 64.211,3.658 81.89,3.658 81.89,17.348 64.211,17.348

## Silkscreen, mask and mechanical layers (free items; w line width, h text height)
Top Overlay:
  text "Smart Thing" at 4.978,27.496 h1.7
  text "V1.0" at 8.966,26.251 h1
  text "Design by NST" at 4.949,24.495 h1.4

## Text inside footprints (layer, text, board x,y; h text height)
FB1: Mechanical 6 "Land Pattern Adapted for Reflow Soldering" at 37.1,38.403 h0.64 r270
FB2: Mechanical 6 "Land Pattern Adapted for Reflow Soldering" at 35.322,21.091 h0.64 r270
FB3: Mechanical 6 "Land Pattern Adapted for Reflow Soldering" at 19.618,6.925 h0.64 r90
FB4: Mechanical 6 "Land Pattern Adapted for Reflow Soldering" at 35.601,44.104 h0.64 r270
FB6: Mechanical 6 "Land Pattern Adapted for Reflow Soldering" at 38.243,38.389 h0.64 r270
U1: Mechanical 7 "Default Padstyle: RX13p78Y39p37D0T" at 29.121,20.678 h0.64 r180; Mechanical 7 "Heat Tab Padstyle: RX85p04Y85p04D0T" at 29.439,22.202 h0.64 r180; Mechanical 7 "Via Padstyle: EX20Y20D10P" at 26.264,23.726 h0.64 r180; Mechanical 7 "Alt 1 Padstyle: OX60Y90D30P" at 26.899,25.25 h0.64 r180; Mechanical 7 "Alt 2 Padstyle: OX90Y60D30P" at 26.899,26.774 h0.64 r180; Mechanical 7 "0.026in/0.65mm" at 13.028,11.745 h0.64 r180; Mechanical 7 "0.15in/3.8mm" at 20.231,4.875 h0.64 r180; Mechanical 7 "0.15in/3.8mm" at 11.123,12.395 h0.64 r180; Mechanical 7 "0.163in/4.15mm" at 28.704,12.395 h0.64 r180; Mechanical 7 "0.163in/4.15mm" at 20.549,18.646 h0.64 r180; Mechanical 13 "*" at 19.79,11.413 h0.64 r180
U2: Mechanical 7 "Default Padstyle: RX11p81Y29p69D0T" at 40.221,23.657 h0.64 r180; Mechanical 7 "Heat Tab Padstyle: RX259p84Y259p84D0T" at 41.173,25.181 h0.64 r180; Mechanical 7 "Via Padstyle: EX20Y20D10P" at 37.363,26.705 h0.64 r180; Mechanical 7 "Alt 1 Padstyle: OX60Y90D30P" at 37.998,28.229 h0.64 r180; Mechanical 7 "Alt 2 Padstyle: OX90Y60D30P" at 37.998,29.753 h0.64 r180; Mechanical 7 "0.02in/0.5mm" at 22.19,10.437 h0.64 r180; Mechanical 7 "0.312in/7.921mm" at 31.807,3.978 h0.64 r180; Mechanical 7 "0.312in/7.921mm" at 20.285,13.437 h0.64 r180; Mechanical 7 "0.321in/8.15mm" at 41.742,13.437 h0.64 r180; Mechanical 7 "0.321in/8.15mm" at 31.648,21.625 h0.64 r180; Mechanical 13 "*" at 33.073,10.254 h0.64 r180